# Altium PCB CH32V4x7VET-R0-1v1.PcbDoc (part 3 of 3)
Units mil, origin at the board's own origin, x right, y up, seen from the top; angles counter-clockwise.
Board outline 4188.98 x 2720.08 mil, 2 copper layers (Top Layer, Bottom Layer); 73 components, 115 nets, 417 pads, 746 vias.
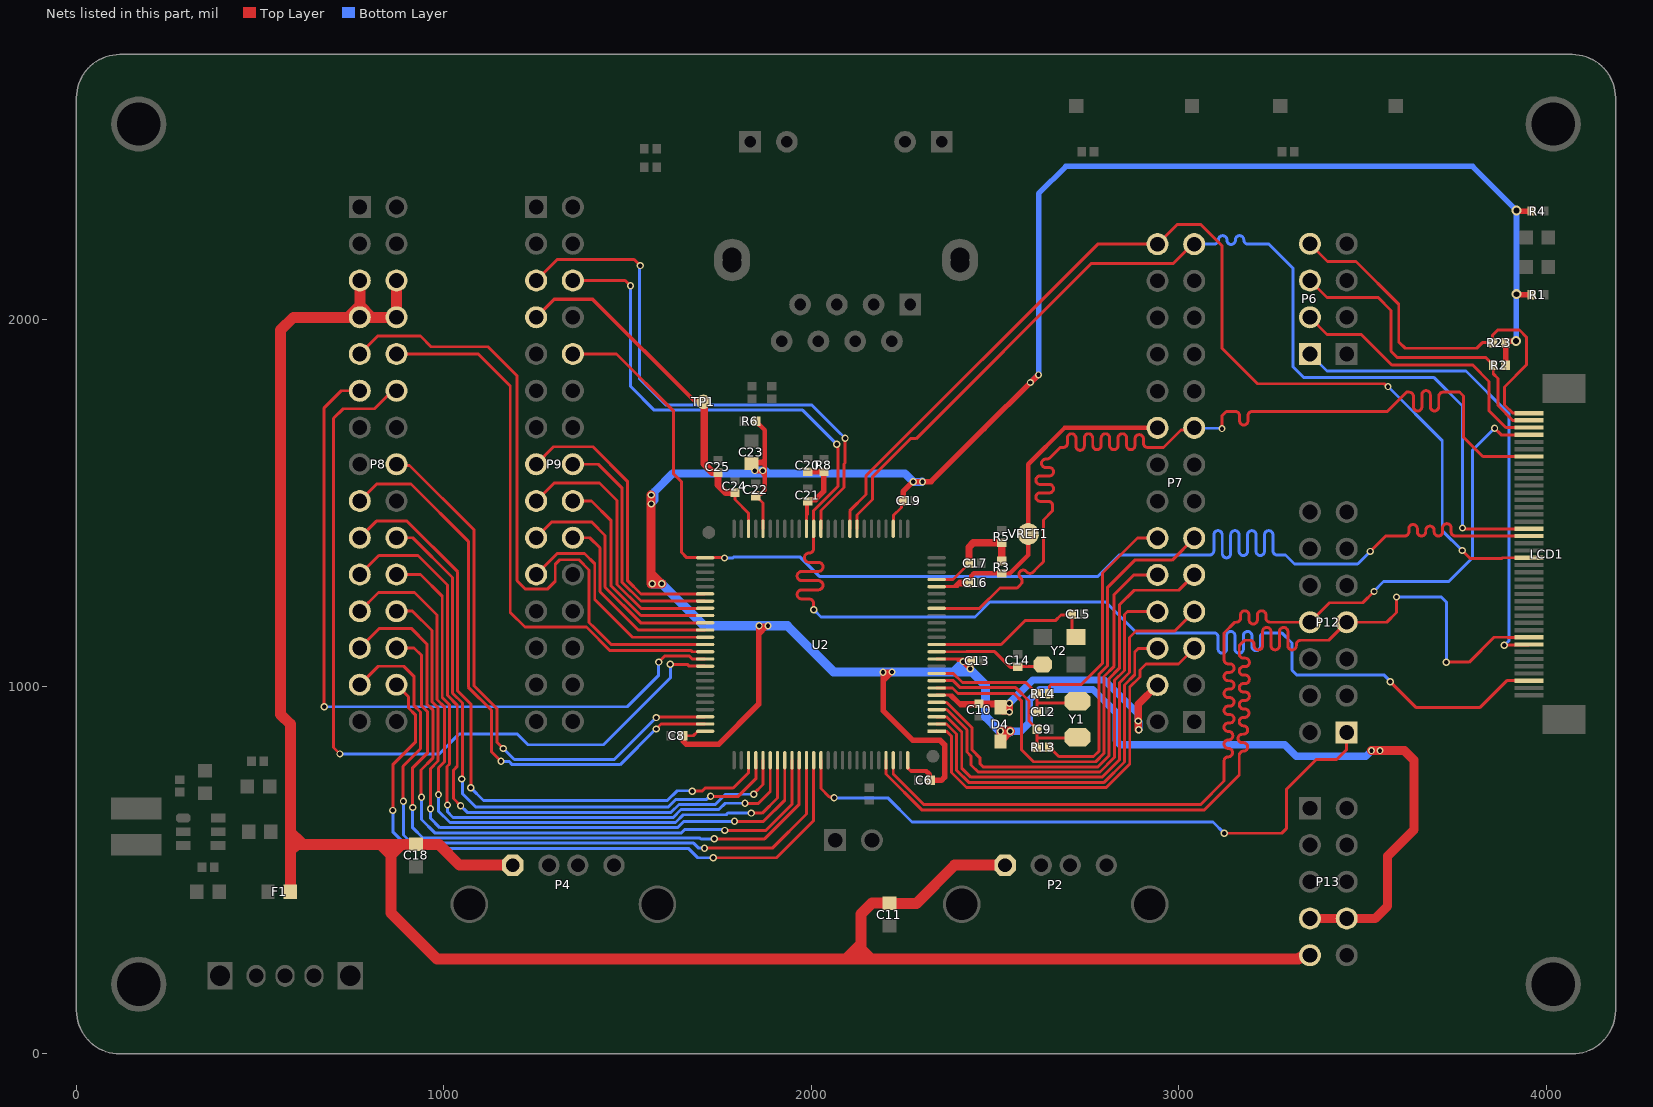
[diagram p3: the nets of this part, all layers, seen from the top]

## Via types
v1: diameter 19.68, hole 11.81, Top Layer to Bottom Layer, tented both sides, 741 vias
v2: diameter 27.56, hole 15.75, Top Layer to Bottom Layer, tented both sides, 5 vias

## Nets (pads, with @x,y where several pads share a name; then routed paths per layer and width w, separated by ;. In a path a pad name is that pad's centre, name@x,y a point inside that pad or via, vN(x,y) a via of type N, cw(c..) or ccw(c..) an arc to the next point about the centre after c; other vN are vias at no path point) (continued)
PC3: LCD1.34 P7.17 U2.18 | length 2946
  Top Layer w8: U2.18@2341.12,1212.52 2458.09,1212.52 2513.82,1268.25 2560.46,1268.25 2567.81,1275.6 2570.64,1278.43 ccw(c2562.51,1286.56) 2570.64,1294.69 2568.45,1296.88 cw(c2576.58,1305.01) 2568.45,1313.14 cw(c2576.58,1305.01) 2584.71,1313.14 2586.9,1310.95 ccw(c2595.03,1319.09) 2603.17,1310.95 2614.68,1322.47 2631.82,1339.61 2631.82,1453.12 2656.74,1478.04 2656.74,1488.3 2656.74,1492.3 ccw(c2645.24,1492.3) 2645.24,1503.8 2622.71,1503.8 cw(c2622.71,1515.3) 2622.71,1526.8 2647.98,1526.8 ccw(c2647.98,1538.3) 2647.98,1549.8 2622.71,1549.8 cw(c2622.71,1561.3) 2622.71,1572.8 2647.98,1572.8 ccw(c2647.98,1584.3) 2647.98,1595.8 2638.26,1595.8 cw(c2638.26,1607.3) 2638.26,1618.8 2641.21,1618.8 ccw(c2641.21,1630.3) 2649.34,1622.17 2675.1,1647.93 2677.55,1650.38 2681.55,1650.38 2685.55,1650.38 ccw(c2685.55,1661.88) 2697.05,1661.88 2697.05,1676.32 cw(c2708.55,1676.32) 2720.05,1676.32 2720.05,1654.08 ccw(c2731.55,1654.08) 2743.05,1654.08 2743.05,1676.32 cw(c2754.55,1676.32) 2766.05,1676.32 2766.05,1655.93 ccw(c2777.55,1655.93) 2789.05,1655.93 2789.05,1676.32 cw(c2800.55,1676.32) 2812.05,1676.32 2812.05,1655.93 ccw(c2823.55,1655.93) 2835.05,1655.93 2835.05,1676.32 cw(c2846.55,1676.32) 2858.05,1676.32 2858.05,1655.93 ccw(c2869.55,1655.93) 2881.05,1655.93 2881.05,1673.81 cw(c2892.55,1673.81) 2904.05,1673.81 2904.05,1661.88 ccw(c2915.55,1661.88) 2915.55,1650.38 2953.5,1650.38 2958.73,1650.38 3006.6,1698.25 3036.73,1698.25 P7.17@3042.2,1703.72 ; v1(3118.01,1701.74) 3118.01,1736.86 3127.11,1745.95 3129.59,1748.43 3154.11,1748.43 cw(c3154.11,1736.93) 3165.61,1736.93 3165.61,1723.07 ccw(c3177.11,1723.07) 3188.61,1723.07 3188.61,1736.93 cw(c3200.11,1736.93) 3200.11,1748.43 3229.11,1748.43 3567.5,1748.43 3606.02,1786.94 3619.94,1800.87 3627.27,1800.87 cw(c3627.27,1789.37) 3638.77,1789.37 3638.77,1761.08 ccw(c3650.27,1761.08) 3661.77,1761.08 3661.77,1793.61 cw(c3673.27,1793.61) 3684.77,1793.61 3684.77,1761.36 ccw(c3696.27,1761.36) 3707.77,1761.36 3707.77,1789.37 cw(c3719.27,1789.37) 3719.27,1800.87 3764.65,1800.87 3767.16,1798.36 3775.33,1790.19 3775.33,1678.11 3827.64,1625.8 LCD1.34@3953.86,1625.8
  Bottom Layer w8: P7.17@3042.2,1703.72 3043.19,1702.73 3117.02,1702.73 v1(3118.01,1701.74)
PC4: LCD1.24 P7.27 U2.33 | length 2939.8
  Top Layer w8: U2.33@2124.59,1429.05 2124.59,1466.47 2166.7,1508.58 2166.7,1570.91 2270.17,1674.39 2285.53,1674.39 2762.73,2151.58 2985.53,2151.58 P7.27@3044.06,2210.1 ; v1(3772.43,1431.3) 3774.67,1429.07 3782.76,1429.07 3782.96,1428.87 3953.77,1428.87 LCD1.24@3953.86,1428.95
  Bottom Layer w8: P7.27@3042.2,2203.72 3092.65,2203.72 3096.65,2203.72 ccw(c3096.65,2215.22) 3108.15,2215.22 ; 3108.15,2215.26 cw(c3119.65,2215.26) 3131.15,2215.26 3131.15,2214.48 ccw(c3142.65,2214.48) 3154.15,2214.48 3154.15,2215.26 cw(c3165.65,2215.26) 3177.15,2215.26 ; 3177.15,2215.22 ccw(c3188.65,2215.22) 3188.65,2203.72 3222.69,2203.72 3245.69,2203.72 3311.06,2138.36 3311.06,1870.13 3340.92,1840.26 3695.41,1840.26 3772.43,1763.24 v1(3772.43,1431.3)
PC5: LCD1.20 P7.28 U2.34 | length 2934.7
  Top Layer w8: U2.34@2104.9,1429.05 2104.9,1478.06 2149.26,1522.42 2149.26,1573.28 2779.71,2203.72 P7.28@2942.2,2203.72 2942.65,2203.72 2996.09,2257.16 3059.98,2257.16 3117.82,2199.32 3117.82,1920.16 3214.17,1823.81 3559.31,1823.81 3567.04,1816.08 v1(3569.84,1816.08) ; v1(3771.49,1369.77) 3793.18,1348.09 3880.1,1348.09 3882.22,1350.21 LCD1.20@3953.86,1350.21
  Bottom Layer w8: v1(3569.84,1816.08) 3717.35,1668.57 3717.35,1423.92 v1(3771.49,1369.77)
PC6: P8.9 U2.63 | length 1811.8
  Top Layer w8: P8.9@771.2,1904.72 820.01,1953.54 936.06,1953.54 965.16,1924.44 1120.04,1924.44 1198.89,1845.6 1198.89,1287.93 1222.09,1264.72 1281.67,1264.72 1303.24,1286.29 1303.24,1332.58 1315.39,1344.72 1367.77,1344.72 1395.27,1317.23 1395.27,1174.23 1410.78,1158.72 1455.41,1114.09 U2.63@1711.2,1114.09
PC7: P8.10 U2.64 | length 1536.7
  Top Layer w8: P8.10@871.2,1904.72 1093.66,1904.72 1180.72,1817.66 1180.72,1201.35 1220.47,1161.6 1388.11,1161.6 1452.33,1097.38 1673.01,1097.38 1675.98,1094.41 U2.64@1711.2,1094.41
PC8: P8.11 U2.65 | length 2049.2
  Top Layer w8: v1(674.25,944.45) 674.25,1758.26 720.72,1804.72 P8.11@771.2,1804.72 ; v1(1584.68,1066.14) 1601.92,1083.38 1667.22,1083.38 1675.87,1074.72 U2.65@1711.2,1074.72
  Bottom Layer w8: v1(674.25,944.45) 674.52,944.72 1499.24,944.72 1584.68,1030.17 v1(1584.68,1066.14)
PC9: P8.12 U2.66 | length 2266.2
  Top Layer w8: v1(717.09,816.42) 699.95,833.55 699.95,1729.65 725.99,1755.69 811.48,1755.69 860.51,1804.72 P8.12@871.2,1804.72 ; v1(1616.46,1060.22) 1662.64,1060.22 1667.82,1055.04 U2.66@1711.2,1055.04
  Bottom Layer w8: v1(717.09,816.42) 987.41,816.42 1042.04,871.05 1199.37,871.05 1229.09,841.34 1434.55,841.34 1616.46,1023.25 v1(1616.46,1060.22)
PC10: P8.19 U2.78 | length 1782.6
  Top Layer w8: P8.19@771.2,1404.72 816.18,1449.7 899.76,1449.7 1037.6,1311.86 1037.6,987.34 1074.44,950.51 1074.44,725.15 v1(1073.26,723.97) ; v1(1676.3,714.82) 1702.21,714.82 1707.05,719.66 1707.26,719.66 1710.96,723.35 1787.54,723.35 1829.31,765.13 U2.78@1829.31,799.13
  Bottom Layer w8: v1(1073.26,723.97) 1108,689.24 1608.23,689.24 1635.03,716.03 1675.09,716.03 v1(1676.3,714.82)
PC11: P8.20 U2.79 | length 1694.1
  Top Layer w8: P8.20@871.2,1404.72 915.4,1404.72 1023.6,1296.52 1023.6,981.54 1050.38,954.77 1050.38,749.41 v1(1048.89,747.91) ; v1(1725.94,701.4) 1726.39,700.96 1801.44,700.96 1849,748.51 U2.79@1849,799.13
  Bottom Layer w8: v1(1048.89,747.91) 1050.38,746.42 1050.38,707.96 1086.05,672.29 1611.09,672.29 1631.61,692.81 1715.42,692.81 1724,701.4 v1(1725.94,701.4)
PC12: P8.21 U2.80 | length 1846
  Top Layer w8: P8.21@771.2,1304.72 822.96,1356.48 929.4,1356.48 1009.6,1276.28 1009.6,975.74 1036.38,948.97 1036.38,782.48 1026,772.1 1026,695.11 v1(1045.55,675.56) ; v1(1843.54,706.59) 1843.54,707.69 1868.68,732.82 U2.80@1868.68,799.13
  Bottom Layer w8: v1(1045.55,675.56) 1063.62,657.49 1618.56,657.49 1639.89,678.81 1738.68,678.81 1766.46,706.59 v1(1843.54,706.59)
PC13: P7.10 U2.7 | length 1210
  Top Layer w8: U2.7@2341.12,995.98 2384.33,995.98 2399.4,980.92 2551.53,980.92 2572.66,959.79 2572.66,826.78 2604.46,794.98 2773.92,794.98 2796.79,817.85 2796.79,1027.39 2824.42,1055.01 2824.42,1250.02 2878.12,1303.72 P7.10@2942.2,1303.72
PC14: P7.11 R13.1 | length 899.6
  Top Layer w8: R13.1@2647.79,834.91 2647.79,833.93 2655.6,826.12 2656.58,826.12 2673.72,808.98 2768.12,808.98 2782.79,823.65 2782.79,1033.18 2806.74,1057.13 2806.74,1270.09 2880.37,1343.72 2982.2,1343.72 P7.11@3042.2,1403.72
PC15: P7.12 R14.1 | length 625.8
  Top Layer w8: R14.1@2647.79,979.91 2647.79,1000.06 2652.67,1004.94 2734.75,1004.94 2792.74,1062.93 2792.74,1308.83 2887.63,1403.72 P7.12@2942.2,1403.72
PD0: P8.22 U2.81 | length 1746.7
  Top Layer w8: P8.22@871.2,1304.72 936.25,1304.72 995.6,1245.37 995.6,969.94 1015.19,950.36 1015.19,788.43 1008.83,782.07 1008.83,678.29 v1(1009.95,677.17) ; v1(1819.43,682.13) 1820.23,681.33 1855.93,681.33 1888.37,713.77 U2.81@1888.37,799.13
  Bottom Layer w8: v1(1009.95,677.17) 1009.95,658.72 1025.18,643.49 1624.36,643.49 1645.68,664.81 1748.39,664.81 1765.7,682.13 v1(1819.43,682.13)
PD1: P8.23 U2.82 | length 1871.2
  Top Layer w8: P8.23@771.2,1204.72 822.05,1255.58 920.39,1255.58 981.6,1194.36 981.6,964.15 1001.19,944.56 1001.19,794.23 985.35,778.38 v1(985.35,705.66) ; v1(1836.65,655.21) 1836.84,655.02 1866.4,655.02 1908.05,696.67 U2.82@1908.05,799.13
  Bottom Layer w8: v1(985.35,705.66) 985.78,705.22 985.78,660.3 1016.6,629.49 1630.15,629.49 1651.48,650.81 1768.5,650.81 1772.89,655.21 v1(1836.65,655.21)
PD2: P8.24 U2.83 | length 1759.2
  Top Layer w8: P8.24@871.2,1204.72 914.78,1204.72 967.6,1151.9 967.6,958.35 983.87,942.08 983.87,796.71 963.27,776.1 963.27,681.91 963.44,681.74 v1(963.44,666.88) ; v1(1791.12,632.85) 1870.3,632.85 1927.74,690.29 U2.83@1927.74,799.13
  Bottom Layer w8: v1(963.44,666.88) 963.44,641.05 989,615.49 1635.95,615.49 1653.32,632.85 v1(1791.12,632.85)
PD3: P8.25 U2.84 | length 1898.1
  Top Layer w8: P8.25@771.2,1104.72 824.58,1158.1 911.29,1158.1 953.6,1115.78 953.6,952.55 969.87,936.28 969.87,804.71 937.61,772.45 937.61,699.67 v1(939.06,698.21) ; v1(1764.35,608.18) 1876.31,608.18 1947.42,679.29 U2.84@1947.42,799.13
  Bottom Layer w8: v1(939.06,698.21) 939.06,637.69 975.26,601.49 1646.6,601.49 1655.5,610.39 1762.14,610.39 v1(1764.35,608.18)
PD4: P8.26 U2.85 | length 1792.4
  Top Layer w8: P8.26@871.2,1104.72 918.71,1104.72 939.6,1083.83 939.6,946.75 955.87,930.48 955.87,819.58 915.1,778.81 v1(915.1,670.7) ; v1(1735.81,585.31) 1873.24,585.31 1967.11,679.18 U2.85@1967.11,799.13
  Bottom Layer w8: v1(915.1,670.7) 915.1,615.39 943.01,587.49 1697.08,587.49 1699.25,585.31 v1(1735.81,585.31)
PD5: P8.27 U2.86 | length 1935.6
  Top Layer w8: P8.27@771.2,1004.72 821.47,1055 890.78,1055 919.15,1026.63 919.15,947.4 936.35,930.2 936.35,830.53 888.49,782.67 888.49,688.57 v1(889.85,687.21) ; v1(1709.21,559.85) 1893.87,559.85 1986.79,652.77 U2.86@1986.79,799.13
  Bottom Layer w8: v1(889.85,687.21) 889.85,595.64 912.01,573.49 1679.99,573.49 1693.63,559.85 v1(1709.21,559.85)
PD6: P8.28 U2.87 | length 1827.8
  Top Layer w8: v1(861.05,662.61) 861.05,786.8 922.35,848.11 922.35,923.1 904.12,941.32 904.12,971.8 P8.28@871.2,1004.72 ; v1(1733.04,533.68) 1905.41,533.68 2006.48,634.75 U2.87@2006.48,799.13
  Bottom Layer w8: v1(861.05,662.61) 861.05,604.56 906.11,559.49 1665.18,559.49 1690.98,533.68 v1(1733.04,533.68)
PD7: P12.1 U2.88 | length 1762.1
  Top Layer w8: U2.88@2026.16,799.13 2026.16,721.88 2049.14,698.91 2059.99,698.91 v1(2062.16,696.74) ; v1(3123.93,600.45) 3280.5,600.45 3292.87,612.81 3292.87,719.57 3374.1,800.81 3430.02,800.81 3457.2,827.99 P12.1@3457.2,874.72
  Bottom Layer w8: v1(2062.16,696.74) 2208.38,696.74 2273.81,631.3 3093.07,631.3 v1(3123.93,600.45)
PD8: LCD1.23 P9.10 U2.51 | length 3731.1
  Top Layer w8: P9.10@1351.2,1904.72 1470.02,1904.72 1625.6,1749.15 1625.6,1577.96 1647.22,1556.34 1647.22,1364.16 1660.87,1350.51 1711.01,1350.51 U2.51@1711.2,1350.31 1763.1,1350.31 v1(1763.97,1349.44) ; v1(3521.42,1367.47) 3563.41,1409.46 3610.83,1409.46 3614.83,1409.46 ccw(c3614.83,1420.96) 3626.33,1420.96 3626.33,1429.26 cw(c3637.83,1429.26) 3649.33,1429.26 3649.33,1420.96 ccw(c3660.83,1420.96) 3672.33,1420.96 3672.33,1424.82 cw(c3683.83,1424.82) 3695.33,1424.82 3695.33,1420.96 ccw(c3706.83,1420.96) 3718.33,1420.96 3718.33,1431.47 cw(c3729.83,1431.47) 3741.33,1431.47 3741.33,1420.96 ccw(c3752.83,1420.96) 3752.83,1409.46 3780.55,1409.46 3953.67,1409.46 LCD1.23@3953.86,1409.27
  Bottom Layer w8: v1(1763.97,1349.44) 1786.61,1349.44 1789.81,1352.65 1968.87,1352.65 2021.77,1299.75 2780.28,1299.75 2838.25,1357.72 3080,1357.72 3084.01,1357.72 ccw(c3084.01,1369.22) 3095.51,1369.22 3095.51,1412.52 cw(c3107.01,1412.52) 3118.51,1412.52 3118.51,1361.55 ccw(c3130.01,1361.55) 3141.51,1361.55 3141.51,1412.52 cw(c3153.01,1412.52) 3164.51,1412.52 3164.51,1367.82 ccw(c3176.01,1367.82) 3187.51,1367.82 3187.51,1412.52 cw(c3199.01,1412.52) 3210.51,1412.52 3210.51,1367.82 ccw(c3222.01,1367.82) 3233.51,1367.82 3233.51,1412.52 cw(c3245.01,1412.52) 3256.51,1412.52 3256.51,1369.22 ccw(c3268.01,1369.22) 3268.01,1357.72 3290.78,1357.72 3315.34,1333.16 3321.91,1333.16 3487.11,1333.16 v1(3521.42,1367.47)
PD9: P9.15 U2.56 | length 803.5
  Top Layer w8: P9.15@1251.2,1604.72 1298.76,1652.29 1405.64,1652.29 1499.36,1558.57 1499.36,1288.94 1536.4,1251.89 U2.56@1711.2,1251.89
PD10: P9.16 U2.57 | length 664.4
  Top Layer w8: P9.16@1351.2,1604.72 1420.06,1604.72 1485.36,1539.43 1485.36,1283.14 1536.29,1232.2 U2.57@1711.2,1232.2
PD11: P9.17 U2.58 | length 755.6
  Top Layer w8: P9.17@1251.2,1504.72 1300.34,1553.86 1423.3,1553.86 1471.36,1505.81 1471.36,1277.34 1536.18,1212.52 U2.58@1711.2,1212.52
PD12: P9.18 U2.59 | length 593.4
  Top Layer w8: P9.18@1351.2,1504.72 1402.13,1504.72 1454.41,1452.45 1454.41,1274.49 1536.06,1192.83 U2.59@1711.2,1192.83
PD13: P9.19 U2.60 | length 673.4
  Top Layer w8: P9.19@1251.2,1404.72 1293.65,1447.17 1402.43,1447.17 1438.92,1410.69 1438.92,1270.18 1535.95,1173.15 U2.60@1711.2,1173.15
PD14: P9.20 U2.61 | length 533.9
  Top Layer w8: P9.20@1351.2,1404.72 1397.03,1404.72 1424.61,1377.14 1424.61,1257.88 1529.02,1153.46 U2.61@1711.2,1153.46
PD15: P9.21 U2.62 | length 635.2
  Top Layer w8: P9.21@1251.2,1304.72 1308.46,1361.98 1382.82,1361.98 1410.61,1334.19 1410.61,1236.92 1513.74,1133.78 U2.62@1711.2,1133.78
PE0: LCD1.9 P12.7 U2.97 | length 2933.3
  Top Layer w8: U2.97@2203.33,799.13 2203.33,761.65 2300.7,664.28 3070.04,664.28 3164.77,759.01 3164.77,761.35 3164.77,812.35 cw(c3176.27,812.35) 3176.27,823.85 ccw(c3176.27,835.35) 3176.27,846.85 3172.99,846.85 cw(c3172.99,858.35) 3172.99,869.85 3176.27,869.85 ccw(c3176.27,881.35) 3176.27,892.85 cw(c3176.27,904.35) 3176.27,915.85 3179.75,915.85 ccw(c3179.75,927.35) 3179.75,938.85 3176.27,938.85 cw(c3176.27,950.35) 3176.27,961.85 3180.81,961.85 ccw(c3180.81,973.35) 3180.81,984.85 3176.27,984.85 cw(c3176.27,996.35) 3176.27,1007.85 3180.81,1007.85 ccw(c3180.81,1019.35) 3180.81,1030.85 3176.27,1030.85 cw(c3176.27,1042.35) 3176.27,1053.85 3180.81,1053.85 ccw(c3180.81,1065.35) 3180.81,1076.85 3176.27,1076.85 cw(c3176.27,1088.35) 3164.77,1088.35 3164.77,1092.35 3164.77,1110.93 3169.79,1115.95 3179.48,1125.65 3193.62,1125.65 cw(c3193.62,1114.15) 3205.12,1114.15 3205.12,1111.03 ccw(c3216.62,1111.03) 3228.12,1111.03 3228.12,1149.22 cw(c3239.62,1149.22) 3251.12,1149.22 3251.12,1111.03 ccw(c3262.62,1111.03) 3274.12,1111.03 3274.12,1149.22 cw(c3285.62,1149.22) 3297.12,1149.22 3297.12,1111.03 ccw(c3308.62,1111.03) 3320.12,1111.03 3320.12,1114.15 cw(c3331.62,1114.15) 3331.62,1125.65 3335.62,1125.65 3408.12,1125.65 P12.7@3457.2,1174.72 3566.03,1174.72 3592.72,1201.42 v1(3592.72,1243.29) ; v1(3728.07,1066.04) 3790.52,1066.04 3858.34,1133.86 3895.29,1133.86 3895.47,1133.68 LCD1.9@3953.86,1133.68
  Bottom Layer w8: v1(3592.72,1243.29) 3714.85,1243.29 3728.81,1229.34 3728.81,1066.78 v1(3728.07,1066.04)
PE1: LCD1.37 P12.8 U2.98 | length 2933.3
  Top Layer w8: U2.98@2223.01,799.13 2223.01,761.77 2306.5,678.28 3059.33,678.28 3123.36,742.32 3123.36,771.22 3123.36,796.98 cw(c3134.86,796.98) 3134.86,808.48 ccw(c3134.86,819.98) 3134.86,831.48 cw(c3134.86,842.98) 3134.86,854.48 3135.99,854.48 ccw(c3135.99,865.98) 3135.99,877.48 3134.86,877.48 cw(c3134.86,888.98) 3134.86,900.48 3139.27,900.48 ccw(c3139.27,911.98) 3139.27,923.48 3134.86,923.48 cw(c3134.86,934.98) 3134.86,946.48 3139.27,946.48 ccw(c3139.27,957.98) 3139.27,969.48 3134.86,969.48 cw(c3134.86,980.98) 3134.86,992.48 3139.27,992.48 ccw(c3139.27,1003.98) 3139.27,1015.48 3134.86,1015.48 cw(c3134.86,1026.98) 3134.86,1038.48 3139.27,1038.48 ccw(c3139.27,1049.98) 3139.27,1061.48 3134.86,1061.48 cw(c3134.86,1072.98) 3123.36,1072.98 3123.36,1076.98 3123.36,1145.29 3152.8,1174.72 3156.8,1174.72 ccw(c3156.8,1186.22) 3168.3,1186.22 3168.3,1194.56 cw(c3179.8,1194.56) 3191.3,1194.56 3191.3,1181.39 ccw(c3202.8,1181.39) 3214.3,1181.39 3214.3,1194.56 cw(c3225.8,1194.56) 3237.3,1194.56 3237.3,1186.22 ccw(c3248.8,1186.22) 3248.8,1174.72 3299.28,1174.72 P12.8@3357.2,1174.72 3410.23,1227.75 3501.05,1227.75 v1(3531.85,1258.56) ; v1(3859.71,1702.95) 3877.81,1684.86 LCD1.37@3953.86,1684.86
  Bottom Layer w8: v1@3531.33,1259.08 3557.57,1285.32 3735.01,1285.32 3799.72,1350.03 3799.72,1642.95 v1(3859.71,1702.95)
PE2: P7.5 U2.1 | length 1113.9
  Top Layer w8: U2.1@2341.12,878.37 2340.62,878.37 U2.1@2341.12,877.87 2368.1,877.87 2381.48,864.49 2381.48,766.03 2422.53,724.98 2802.92,724.98 2866.79,788.85 2866.79,998.39 2894.42,1026.02 2894.42,1044.69 2910.65,1060.92 2999.4,1060.92 P7.5@3042.2,1103.72
PE3: P7.6 U2.2 | length 1034.5
  Top Layer w8: U2.2@2341.12,897.56 2368.21,897.56 2395.48,870.29 2395.48,771.83 2428.33,738.98 2797.12,738.98 2852.79,794.65 2852.79,1004.19 2880.42,1031.82 2880.42,1093.68 2890.47,1103.72 P7.6@2942.2,1103.72
PE4: P7.7 U2.3 | length 1192.3
  Top Layer w8: U2.3@2341.12,917.24 2368.33,917.24 2409.48,876.09 2409.48,777.63 2434.13,752.98 2791.32,752.98 2838.79,800.45 2838.79,1009.99 2866.42,1037.62 2866.42,1133.24 2883.98,1150.8 2989.28,1150.8 P7.7@3042.2,1203.72
PE5: P7.8 U2.4 | length 1113.6
  Top Layer w8: U2.4@2341.12,936.93 2368.44,936.93 2423.48,881.89 2423.48,821.58 2435.01,810.05 2435.01,786.33 2454.36,766.98 2785.52,766.98 2824.79,806.25 2824.79,1015.79 2852.42,1043.42 2852.42,1195.72 2860.42,1203.72 P7.8@2942.2,1203.72
PE6: P7.9 U2.5 | length 1258.6
  Top Layer w8: U2.5@2341.12,956.61 2368.55,956.61 2437.48,887.68 2437.48,827.38 2458.77,806.09 2458.77,790.23 2468.02,780.98 2779.72,780.98 2810.79,812.05 2810.79,1021.59 2838.42,1049.22 2838.42,1221.46 2878.74,1261.79 3000.27,1261.79 P7.9@3042.2,1303.72
PE7: C24.2 C25.2 P9.7 TP1.1 U2.48 | length 1015.9
  Top Layer w8: C24.2@1792.32,1527.98 1792.32,1508.49 1829.31,1471.49 U2.48@1829.31,1429.05
  Top Layer w10: P9.7@1247.16,2002.41 1248.89,2002.41 P9.7@1251.2,2004.72 1300.29,2053.81 1404.82,2053.81 1680.69,1777.94 1703.32,1777.94 TP1.1@1706.53,1774.72
  Top Layer w20: TP1.1@1706.53,1774.72 1708.23,1773.02 1708.23,1605.42 1730.44,1583.21 1744.21,1583.21 C25.2@1746.02,1581.4 1746.02,1548.66 1766.7,1527.98 C24.2@1792.32,1527.98
PE8: P9.5 U2.38 | length 1522.9
  Top Layer w8: P9.5@1251.2,2104.72 1308.41,2161.93 1517.93,2161.93 v1(1534.57,2145.29) ; U2.38@2026.16,1429.05 2026.16,1478.51 2089.17,1541.52 2089.17,1605.58 2091.99,1608.41 v1(2091.99,1675.63)
  Bottom Layer w8: v1(1534.57,2145.29) 1532.87,2143.59 1532.87,1836.72 1603.65,1765.94 2001.38,1765.94 2080.33,1686.99 2080.63,1686.99 v1(2091.99,1675.63)
PE9: LCD1.3 P9.6 U2.39 | length 4249
  Top Layer w8: P9.6@1351.2,2104.72 1493.38,2104.72 v1(1507.8,2090.31) ; v1(2006.48,1208.81) 2006.48,1221.39 2006.48,1225.39 ccw(c1993.98,1225.39) 1993.98,1237.89 1973.98,1237.89 cw(c1973.98,1250.39) 1973.98,1262.89 2019.35,1262.89 ccw(c2019.35,1275.39) 2019.35,1287.89 1973.98,1287.89 cw(c1973.98,1300.39) 1973.98,1312.89 2019.35,1312.89 ccw(c2019.35,1325.39) 2019.35,1337.89 1993.74,1337.89 cw(c1993.74,1350.39) 1993.74,1362.89 1993.98,1362.89 ccw(c1993.98,1375.39) 2006.48,1375.39 2006.48,1413.5 U2.39@2006.48,1429.05 2006.48,1478.63 2072.67,1544.82 2072.67,1648.4 2071.77,1649.3 2071.77,1656.69 v1(2069.53,1658.93) ; v1(3575.74,1012.69) 3645.3,943.13 3820.55,943.13 3892.98,1015.57 LCD1.3@3952.8,1015.57
  Bottom Layer w8: v1(1507.8,2090.31) 1507.8,1816.78 1572.65,1751.94 1976.52,1751.94 v1(2069.53,1658.93) ; v1(2006.48,1208.81) 2026.1,1189.18 2445.43,1189.18 2486,1229.75 2801.3,1229.75 2885.05,1146.01 3068.62,1146.01 3095.62,1146.01 cw(c3095.62,1134.51) 3107.12,1134.51 3107.12,1101.91 ccw(c3118.62,1101.91) 3130.12,1101.91 3130.12,1138.22 cw(c3141.62,1138.22) 3153.12,1138.22 3153.12,1101.91 ccw(c3164.62,1101.91) 3176.12,1101.91 3176.12,1138.22 cw(c3187.62,1138.22) 3199.12,1138.22 3199.12,1108.91 ccw(c3210.62,1108.91) 3222.12,1108.91 3222.12,1134.51 cw(c3233.62,1134.51) 3233.62,1146.01 3271.67,1146.01 3280.33,1146.01 3308.04,1118.29 3308.04,1044.31 3320.71,1031.64 3558.15,1031.64 3575.74,1014.05 v1(3575.74,1012.69)
PE10: P8.16 U2.73 | length 1522.8
  Top Layer w8: P8.16@871.2,1604.72 874.37,1601.56 906.8,1601.56 1081.46,1426.9 1081.46,1002.88 1144.14,940.2 1144.14,848.86 v1(1161.93,831.08) ; v1(1578.21,915.09) 1580.17,917.05 1711.01,917.05 U2.73@1711.2,917.24
  Bottom Layer w8: v1(1161.93,831.08) 1191.86,801.15 1464.01,801.15 1577.94,915.09 v1(1578.21,915.09)
PE11: P8.17 U2.74 | length 1619.8
  Top Layer w8: P8.17@771.2,1504.72 817.27,1550.79 910.82,1550.79 1066.62,1394.99 1066.62,997.92 1129.59,934.96 1129.59,822.21 v1(1155.57,796.23) ; v1(1577.96,884.21) 1591.31,897.56 U2.74@1711.2,897.56
  Bottom Layer w8: v1(1155.57,796.23) 1176.98,796.23 1186.06,787.15 1479.8,787.15 1576.86,884.21 v1(1577.96,884.21)
TOUCH_INT: LCD1.38 P6.2 | length 768
  Top Layer w8: P6.2@3357.2,2004.72 3403.91,1958.01 3496.76,1958.01 3580.03,1874.75 3800.33,1874.75 3844.8,1830.28 3844.8,1750.07 3890.32,1704.54 LCD1.38@3953.86,1704.54
TOUCH_RST: LCD1.8 P6.1 | length 1312.9
  Top Layer w8: v1(3886.24,1112.02) 3887.22,1113.01 3952.87,1113.01 LCD1.8@3953.86,1113.99
  Bottom Layer w8: P6.1@3357.2,1904.72 3403.59,1858.34 3782.09,1858.34 3899.45,1740.98 3899.45,1125.23 v1(3886.24,1112.02)
TOUCH_SCLK: LCD1.39 P6.3 R2.2 | length 876.9
  Top Layer w8: P6.3@3357.2,2104.72 3403.75,2058.18 3543.09,2058.18 3577.92,2023.36 3577.92,1912.37 3594.76,1895.52 3835.84,1895.52 3856,1875.36 3856,1851.01 3868.75,1838.27 3868.75,1764.25 3908.77,1724.23 LCD1.39@3953.86,1724.23
TOUCH_SDA: LCD1.40 P6.4 R23.2 | length 1093.8
  Top Layer w8: P6.4@3357.2,2204.72 3405.05,2156.87 3482.27,2156.87 3598.96,2040.18 3598.96,1937.67 3616.27,1920.36 3811.04,1920.36 3826.3,1935.61 3853.88,1935.61 3853.88,1955.76 3868.29,1970.17 3927.39,1970.17 3946.9,1950.65 3946.9,1875.36 3886.83,1815.29 3886.83,1765.97 3908.89,1743.91 LCD1.40@3953.86,1743.91
VBAT: C10.2 D4.1 P7.4 U2.6 | length 1032.6
  Top Layer w8: U2.6@2341.12,976.3 2375.06,976.3 ; C10.2@2443.83,946.19 2443.61,946.4 2404.96,946.4 2399.27,952.09 ; C10.2@2447.72,955.25 2447.03,955.94 2404.57,955.94 ; C10.2@2447.93,946.19 2447.93,950.89 C10.2@2446.73,952.09 ; C10.2@2455.53,952.09 C10.2@2446.73,952.09 ; 2375.06,976.3 2399.27,952.09 ; 2375.06,976.3 2384.21,976.3 2404.57,955.94 ; 2399.27,952.09 2408.42,952.09 ; 2404.57,955.94 2408.42,952.09 ; 2408.42,952.09 C10.2@2446.73,952.09
  Top Layer w20: C10.2@2455.53,952.09 2508.07,952.09 2514.77,945.38 D4.1@2514.77,943.04 2514.77,939.69 2521.11,933.35 2536.39,933.35 v1(2539.25,930.5) 2539.25,952.16 2521.11,952.16 2519.42,950.48 D4.1@2519.42,946.69 ; v1@2889.78,881.97 v1(2889.78,906.02) 2889.78,951.3 P7.4@2942.2,1003.72
  Bottom Layer w20: v1(2539.25,930.5) v1(2539.25,954.16) 2602.58,1017.49 2797.47,1017.49 2889.78,925.18 v1(2889.78,906.02) 2891.2,904.61 v1(2891.2,881.97)
VBUS: C11.1 C18.1 F1.1 P2.1 P4.1 P8.5 P8.6 P8.7 P8.8 P13.9 | length 6340.7
  Top Layer w30: F1.1@582,441.42 582,552.15 ; 582,604.51 611.49,575.02 ; 588.31,570.02 599.87,570.02 ; P8.5@771.2,2104.72 771.2,2036.8 ; 803.45,2004.72 803.28,2004.72 ; P8.6@871.2,2104.72 P8.8@871.2,2004.72 803.28,2004.72 ; 879.71,563.99 856.35,540.63 ; C18.1@924.27,570.22 923.29,570.22 C18.1@923.09,570.02 ; P4.1@1187.49,513.35 1043.1,513.35 986.44,570.02 C18.1@923.09,570.02 ; C11.1@2210.96,410.98 2210.19,410.2 2165.53,410.2 2135.88,380.55 2135.88,299.49 ; C11.1@2212.68,409.52 2285.84,409.52 2389.67,513.35 P2.1@2527.49,513.35 ; P13.9@3357.2,268.44 3351.46,262.7 3330.25,262.7 3325.82,258.27 2162.91,258.27 ; 582,552.15 582,897.85 555.65,924.2 555.65,1969.69 590.68,2004.72 739.12,2004.72 ; 582,552.15 599.87,570.02 ; 599.87,570.02 826.95,570.02 ; 739.12,2004.72 771.2,2036.8 ; 739.12,2004.72 P8.7@771.2,2004.72 ; P8.7@771.2,2004.72 803.28,2004.72 ; P8.7@771.2,2004.72 771.2,2036.8 ; 771.2,2036.8 803.28,2004.72 ; 826.95,570.02 856.35,570.02 ; 826.95,570.02 856.35,540.63 ; 856.35,540.63 856.35,383.51 981.58,258.27 2094.66,258.27 ; 856.35,540.63 856.35,546.66 856.35,570.02 ; 856.35,570.02 879.71,570.02 C18.1@923.09,570.02 ; 2094.66,258.27 2118.31,258.27 ; 2094.66,258.27 2135.88,299.49 ; 2118.31,258.27 2135.88,275.84 2135.88,285.3 ; 2118.31,258.27 2162.91,258.27 ; 2135.88,285.3 2135.88,299.49 ; 2135.88,285.3 2162.91,258.27
VDD: C6.2 C8.1 C13.1 C19.2 C22.2 C23.2 D4.2 P13.7 P13.8 R1.1 R2.1 R4.1 R6.2 R23.1 U2.11 U2.28 U2.46 U2.75 U2.100 | length 9508.7
  Top Layer w8: C8.1@1651.2,865.72 1678.55,865.72 1690.37,877.55 1710.87,877.55 U2.75@1711.2,877.87 ; C22.2@1850.44,1517.11 1868.68,1498.87 U2.46@1868.68,1429.05 ; U2.28@2223.01,1429.05 2223.2,1429.25 2223.2,1464.94 2245.33,1487.07 2245.33,1506.16 C19.2@2249.94,1510.77 ; 2313.11,766.46 2317.7,761.88 2317.7,751.12 C6.2@2324.27,744.55 2324.27,762.26 2318.2,768.33 ; U2.11@2341.12,1074.72 2395.37,1074.72 ; v1@2411.66,1067.85 2409.69,1069.82 2400.27,1069.82 2395.37,1074.72 ; C13.1@2435.12,1069.59 2429.98,1074.72 2395.37,1074.72 ; U2.100@2262.57,778.44 2262.57,798.94 U2.100@2262.38,799.13 2262.38,778.63 U2.100@2262.57,778.44 ; U2.100@2262.57,778.44 2262.57,777.36 2268.61,771.32 ; U2.100@2262.57,778.44 2269.7,771.32 ; 2268.61,771.32 2269.7,771.32 ; 2268.61,771.32 2271.6,768.33 2318.2,768.33 ; 2269.7,771.32 2315.21,771.32 2318.2,768.33
  Top Layer w12: C22.2@1848.44,1518.13 1854.25,1523.94 1862.37,1523.94 1873.24,1534.81 1873.24,1574.98 ; C23.2@1848.44,1607.19 1871.65,1607.19 1873.24,1605.59 ; C22.2@1850.44,1517.13 C22.2@1853.44,1514.13 ; R6.2@1850.44,1721.52 1850.44,1720.54 1873.24,1697.74 1873.24,1616.94 ; v1@1850.91,1585.03 1863.19,1585.03 1873.24,1574.98 ; 1859.44,1611.05 1867.36,1611.05 1873.24,1616.94 ; 1873.24,1574.98 1873.24,1605.59 ; 1873.24,1605.59 1873.24,1616.94
  Top Layer w15: C8.1@1651.2,865.72 1651.2,851.13 1659.9,842.43 1747.87,842.43 1857.06,951.61 1857.06,1143.36 ; v1@1857.06,1160.64 1857.06,1143.36 ; v1@1861.85,1163.44 1862.43,1164.02 1881.27,1164.02 v1(1882.17,1164.92) ; v1@1876.22,1162.53 1857.06,1143.36 ; v1(2219.51,1039.11) v1@2219.25,1038.85 ; C19.2@2249.94,1510.77 2250.07,1510.77 2250.07,1530.03 v1(2277.33,1557.28) 2326.42,1557.28 2470.59,1701.45 v1(2596.41,1827.27) 2596.53,1827.39 2597.31,1827.39 2617.78,1847.86 v1(2618.56,1847.86) ; C6.2@2324.27,744.55 2354.2,744.55 2362.98,753.34 2362.98,841.27 2351.01,853.24 2276.25,853.24 2195.24,934.26 2195.24,1014.84 ; v1@2414.4,1070.42 2414.4,1066.72 v1(2432.95,1048.17) 2433.85,1049.06 C13.1@2433.85,1068.31 ; v1@2420.51,1068.25 2433.78,1068.25 C13.1@2433.85,1068.31 ; C13.1@2435.12,1069.59 C13.1@2433.85,1068.31 ; R23.1@3889.34,1934.13 3889.47,1934 R2.1@3889.47,1874.38 ; R23.1@3889.47,1935.82 3893.64,1939.99 v2@3917.05,1939.99 ; v2(3919.11,2067.64) 3920.38,2067.64 3921.99,2066.03 R1.1@3961.14,2066.03 ; v2(3919.58,2295.41) 3920.85,2295.41 3922.49,2293.78 3956.83,2293.78 3956.93,2293.88 R4.1@3961.14,2293.88 ; 2195.24,1014.84 v1@2219.25,1038.85 ; 2195.24,1014.84 v1(2195.24,1038.58) 2195.5,1038.85 v1@2219.25,1038.85
  Top Layer w25: v1@1564.17,1279.68 1564.17,1306.7 ; v1(1564.17,1521.04) v1(1564.17,1496.86) 1564.17,1306.7 ; v1@1564.2,1279.64 v1(1567.25,1279.64) v1(1593.17,1279.64) ; v1@1589.83,1281.05 1564.17,1306.7 ; D4.2@2514.77,850.12 2516.85,850.12 D4.2@2516.85,855.55 ; D4.2@2515.68,854.78 2516.08,854.78 D4.2@2516.85,855.55 ; v1(2541.66,877.92) v1@2539.22,877.92 ; P13.7@3357.2,368.44 P13.8@3457.2,368.44 3534.5,368.44 3568.57,402.51 3568.57,538.39 3640.21,610.03 3640.21,799.57 3614.48,825.3 v1(3548.01,825.3) v1(3524.72,825.3) ; D4.2@2516.85,855.55 v1@2539.22,877.92 ; D4.2@2516.85,855.55 2516.85,877.92 v1@2539.22,877.92
  Bottom Layer w15: v1(2596.41,1827.27) 2597.18,1827.27 2617.78,1847.86 v1(2618.56,1847.86) ; v1@2618.97,1848.27 2618.97,2341.29 2692.88,2415.21 3799.79,2415.21 v2(3919.58,2295.41) 3919.35,2295.18 3919.35,2067.88 v2(3919.11,2067.64) 3918.71,2067.24 3918.71,1939.39 v2@3919.23,1938.88
  Bottom Layer w20: v1(2541.66,877.92) 2570.81,877.92 2593.59,900.7 2593.59,963.14 2621.94,991.49 2766.71,991.49 2829.58,928.62 2829.58,853.09 2841.29,841.37 3288.65,841.37 3319.8,810.22 3509.64,810.22 v1(3524.72,825.3) v1(3548.01,825.3)
  Bottom Layer w22: v1(1564.17,1496.86) v1@1564.17,1498.13 ; v1@2301.8,1557.28 2301.45,1556.93 2277.68,1556.93 v1(2277.33,1557.28) 2255.27,1579.34 1882.34,1579.34 ; v1@1564.17,1498.13 v1(1564.17,1521.04) 1573.82,1530.69 ; v1@1564.17,1498.13 1573.82,1507.78 1573.82,1530.69 ; 1573.82,1530.69 1622.47,1579.34 1822.26,1579.34 ; 1822.26,1579.34 1868.02,1579.34 1882.34,1579.34 ; 1822.26,1579.34 1830.26,1587.34 v1(1846.21,1587.34) v1(1868.02,1587.34) 1874.34,1587.34 1882.34,1579.34
  Bottom Layer w25: v1@1568.14,1278.88 1568.9,1279.64 v1(1593.17,1279.64) ; v1@1593.24,1279.71 1708.04,1164.92 v1(1858.06,1164.92) v1(1882.17,1164.92) 1934.93,1164.92 2060.73,1039.11 v1(2219.51,1039.11) 2387.46,1039.11 ; v1@2412.14,1065.17 v1@2412.14,1064.8 ; v1@2513.39,878.7 2474.39,917.7 2474.39,1002.55 2437.83,1039.11 ; v1(2515.01,877.92) 2516.72,876.22 v1@2540.29,876.22 ; 2387.46,1039.11 2398.88,1039.11 ; 2387.46,1039.11 2412.14,1063.8 v1@2412.14,1064.8 ; 2398.88,1039.11 2437.83,1039.11 ; 2398.88,1039.11 2413.4,1053.63 v1@2413.4,1063.54 ; v1@2412.14,1064.8 v1@2413.4,1063.54 ; v1@2413.4,1063.54 2437.83,1039.11
  other v1: 2413.4,1067.58 2302.86,1556.93
  other v2: 3918.31,1939.99
VDDA: C17.1 R3.1 R5.2 U2.22 | length 294.2
  Top Layer w8: U2.22@2341.12,1291.26 2385.98,1291.26 C17.1@2429.2,1334.48
  Top Layer w20: C17.1@2429.2,1334.48 C17.1@2429.2,1335.46 2429.2,1379.15 2440.92,1390.87 R5.2@2518.14,1390.87 R3.1@2518.14,1341.16
VDDK: C20.2 C21.2 R8.1 U2.40 | length 266.6
  Top Layer w8: U2.40@1986.79,1429.05 1986.79,1465.57 ; C21.2@1989.27,1499.94 1986.79,1497.46 1986.79,1465.57 ; C21.2@1990.7,1501.6 1990.25,1501.14 1990.25,1469.03 1986.79,1465.57
  Top Layer w15: C21.2@1989.27,1499.94 1989.27,1502.27 1995.57,1508.56 2011.66,1508.56 2034.49,1531.39 R8.1@2034.49,1584.62 ; C20.2@1989.27,1584.62 R8.1@2033.51,1584.62
VREF+: C16.1 P7.18 R3.2 U2.21 VREF1.1 | length 989.9
  Top Layer w8: U2.21@2341.12,1271.57 2387.41,1271.57 ; C16.1@2418.99,1276.36 2402.06,1276.36 2397.27,1271.57 2387.41,1271.57 ; C16.1@2424.39,1287.53 2424.2,1287.34 2403.18,1287.34 2398.56,1282.72 ; C16.1@2429.2,1282.72 2398.56,1282.72 ; 2387.41,1271.57 2398.56,1282.72
  Top Layer w11.81: C16.1@2429.2,1282.72 2435.11,1288.63 2435.11,1300.89 2442.03,1307.81 R3.2@2518.02,1307.81 ; R3.2@2521.46,1308.17 2540.98,1308.17 2590.38,1357.57 VREF1.1@2590.38,1414.89 2590.38,1604.92 2689.19,1703.72 P7.18@2942.2,1703.72
X32KI: C9.2 R13.2 U2.8 Y1.1 | length 519.9
  Top Layer w8: U2.8@2341.12,1015.67 2386.48,1015.67 2405.44,996.71 2556.22,996.71 2592.51,960.41 2592.51,906.04 2614.32,884.23 C9.2@2614.32,883.25 2614.32,859.08 ; R13.2@2614.32,834.91 2614.32,859.08 ; Y1.1@2724.35,861.74 2698.41,861.74 2695.75,859.08 2614.32,859.08
X32KO: C12.2 R14.2 U2.9 Y1.2 | length 461.9
  Top Layer w8: U2.9@2341.12,1035.35 2386.59,1035.35 2411.24,1010.71 2583.53,1010.71 R14.2@2614.32,979.91 2614.32,954.66 ; C12.2@2614.32,931.58 2614.32,954.66 ; C12.2@2616.42,934.24 C12.2@2621.5,939.33 ; Y1.2@2695.75,961.29 2689.12,954.66 ; Y1.2@2715.12,954.66 2689.12,954.66 ; 2614.32,954.66 2689.12,954.66
XI: C14.2 U2.12 Y2.1 | length 308.5
  Top Layer w8: U2.12@2341.12,1094.41 2421.87,1094.41 2422.03,1094.57 2499.12,1094.57 2541.74,1051.95 2560.86,1051.95 C14.2@2561.85,1050.95 ; C14.2@2561.85,1053.98 2626.15,1053.98 Y2.1@2629.89,1057.72
XO: C15.2 U2.13 Y2.3 | length 464.9
  Top Layer w8: U2.13@2341.12,1114.09 2516.84,1114.09 2581.67,1178.92 2664.17,1178.92 2679.7,1194.45 C15.2@2703.59,1194.45 ; C15.2@2709.19,1196.96 2709.19,1143.77 Y2.3@2720.44,1132.52
pads on no net: ?.0 LCD1.0 P10. P10.7 S1.0 S1.3 U1.1 U2.0

## Polygon pours and split planes (outlines as drawn)
GND on Top Layer "GND" (solid, remove dead copper, pour order 0): 0,118.11 0,2601.97 cw(c118.11,2601.97) 118.11,2720.08 4070.87,2720.08 cw(c4070.87,2601.97) 4188.98,2601.97 4188.98,118.11 cw(c4070.87,118.11) 4070.87,0 118.11,0 cw(c118.11,118.11)
GND on Bottom Layer "GND" (solid, remove dead copper, pour order 1): 0,118.11 0,2601.97 cw(c118.11,2601.97) 118.11,2720.08 4070.87,2720.08 cw(c4070.87,2601.97) 4188.98,2601.97 4188.98,118.11 cw(c4070.87,118.11) 4070.87,0 118.11,0 cw(c118.11,118.11)

## Keep-outs
Keep-Out Layer:
  the board outline again, w10

## Other copper
Top Layer:
  rectangle net VDD: 1836.22,1579.92 1873.71,1617.41
  region net +5V: 517.16,193.69 517.16,320.69 498.62,339.24 432.5,339.24 414.76,356.98 414.76,572.93 410.5,577.18 369.18,577.18 364.93,572.93 364.93,303.48 386.95,281.47 451.54,281.47 461.59,271.41 461.59,190.06 465.35,186.3 513.44,186.3
  region net NetF1_2: 506.09,461.65 540.19,461.65 543,458.84 543,398.88 594.71,347.16 594.71,186 591.19,182.48 547.73,182.48 535.39,194.81 535.39,339.86 498.98,376.28 498.98,457.94
  region net VBUS: 1207.55,485.04 1042.78,485.04 978.37,549.46 621.03,549.46 611.54,539.97 611.54,421.31 606.11,415.88 572.21,415.88 567.92,420.18 567.92,575.17 593.59,600.84 992.08,600.84 1049.56,543.36 1200.86,543.36 1216.12,528.1 1216.12,493.76
  pour cut-out: 86.17,688.06 86.17,548.95 240.6,548.95 240.6,686.92
  region net 1V2: 119.64,643.58 196.56,643.58 203.92,650.94 203.92,724.95 213.72,734.75 293.19,734.75 308.59,750.14 418.39,750.14 424.2,755.94 424.2,790.16 409.34,805.02 175.79,805.02 119.64,748.86

## Silkscreen, mask and mechanical layers (free items; w line width, h text height)
Top Overlay:
  lines w6: 1689.39,1499.59 1689.39,1471.7 1847.16,1471.7 1847.16,1488.43 ; 2490.35,664.36 2504.97,664.36 2504.97,823.08 2582.57,823.08 ; 1009.22,1044.81 1009.22,1099.32 1009.22,1157.57 1190.82,1157.57 1190.82,1044.81 1009.22,1044.81 ; 1012.62,1944.5 1012.62,1997.16 1012.62,2055.05 1190.73,2055.05 1190.73,1944.5 1012.62,1944.5 ; 1420.01,1044.81 1420.01,1157.57 1598.79,1157.57 1598.79,1044.81 1420.01,1044.81
  text "CH32V4x7V-R0-1v1" at 463.6,2588.91 h40
  text "3V3" at 604.88,2287.3 h35
  text "3V3" at 933.08,2287.3 h35
  text "ELED1" at 1042.44,2286.84 h35
  text "ELED0" at 1414.91,2286.84 h35
  text "3V3" at 604.88,2187.3 h35
  text "PB0" at 1092.41,2187.68 h35
  text "PB1" at 1422.72,2187.68 h35
  text "3V3" at 933.08,2187.09 h35
  text "PC5" at 2780.48,2186.03 h35
  text "PC4" at 3104.43,2186.03 h35
  text "GND" at 3528.24,2184.58 h35
  text "SDA" at 3197.42,2163.61 h35
  text "PE8" at 1092.41,2087.42 h35
  text "PE9" at 1422.72,2087.42 h35
  text "VBUS" at 926.08,2086.87 h35
  text "PA7" at 2780.48,2086.18 h35
  text "PA6" at 3104.43,2086.18 h35
  text "VBUS" at 568.21,2080.53 h35
  text "KEY" at 3521.24,2076.14 h35
  text "VBUS" at 935.46,2075.03 h35 r270
  text "SCLK" at 3168.21,2037.26 h35
  text "PE7/" at 1053.03,2008.34 h35
  text "PB10" at 1422.72,1987.16 h35
  text "PA5" at 2780.48,1986.33 h35
  text "PA4" at 3104.43,1986.33 h35
  text "VBUS" at 565.95,1980.33 h35
  text "LED2" at 3521.24,1975.15 h35
  text "VDD18" at 1024.75,1956.27 h35
  text "INT" at 3201.08,1952.54 h35
  text "PC6" at 604.88,1886.61 h35
  text "PC7" at 933.08,1886.44 h35
  text "PB11" at 1074.92,1886.9 h35
  text "PD8" at 1422.72,1886.9 h35
  text "PA3" at 2780.48,1886.48 h35
  text "PA2" at 3104.43,1886.48 h35
  text "LED1" at 3521.24,1874.16 h35
  text "RST" at 3204,1869.28 h35
  text "PC8" at 604.88,1786.38 h35
  text "PC9" at 933.08,1786.23 h35
  text "PB12" at 1063.25,1786.64 h35
  text "PB13" at 1422.72,1786.64 h35
  text "PA1" at 2792.14,1786.64 h35
  text "PA0" at 3104.43,1786.64 h35
  text "PB14" at 1063.25,1686.37 h35
  text "PB15" at 1422.72,1686.37 h35
  text "VREF+" at 2710.5,1686.79 h35
  text "PC3" at 3104.43,1686.79 h35
  text "PA8" at 604.88,1686.14 h35
  text "PA9" at 933.08,1686.01 h35
  text "PC2" at 2780.48,1586.94 h35
  text "PC1" at 3104.43,1586.94 h35
  text "PA10" at 575.72,1585.91 h35
  text "PE10" at 933.08,1585.8 h35
  text "PD9" at 1092.41,1586.11 h35
  text "PD10" at 1422.72,1586.11 h35
  text "PE11" at 567.82,1488.66 h35
  text "NRST" at 3104.43,1489.09 h35
  text "PC0" at 2780.48,1487.09 h35
  text "PA15" at 933.08,1485.58 h35
  text "PD11" at 1074.92,1485.85 h35
  text "PD12" at 1422.72,1485.85 h35
  text "GND" at 3205.72,1457.34 h35
  text "GND" at 3529.96,1457.34 h35
  text "PC14" at 3104.43,1389.24 h35
  text "PC15" at 2751.32,1387.24 h35
  text "PC11" at 933.08,1385.37 h35
  text "PD13" at 1066.25,1385.59 h35
  text "PD14" at 1422.72,1385.59 h35
  text "PC10" at 575.72,1385.22 h35
  text "GND" at 3529.96,1357.39 h35
  text "GND" at 3205.72,1348.54 h35
  text "PE6" at 3104.43,1289.39 h35
  text "PC13" at 2751.32,1287.39 h35
  text "PD15" at 1063.25,1285.33 h35
  text "3V3" at 1422.72,1285.33 h35
  text "PC12" at 575.72,1284.99 h35
  text "PD0" at 933.08,1285.15 h35
  text "GND" at 3529.96,1257.44 h35
  text "GND" at 3205.72,1249.23 h35
  text "PE5" at 2780.48,1187.54 h35
  text "PE4" at 3104.43,1187.54 h35
  text "PD1" at 616.54,1184.75 h35
  text "PD2" at 933.08,1184.94 h35
  text "3V3" at 1092.41,1185.07 h35
  text "3V3" at 1422.72,1185.07 h35
  text "PE0" at 3529.96,1157.49 h35
  text "PE1" at 3217.38,1154.93 h35
  text "PD4" at 938.2,1143.33 h35 r270
  text "PE12/" at 1019.61,1107.46 h35
  text "PB2/" at 1426.48,1100.46 h35
  text "PE3" at 2780.48,1087.69 h35
  text "PE2" at 3104.43,1087.69 h35
  text "PD3" at 604.88,1084.52 h35
  text "BOOT0" at 1019.61,1057.78 h35
  text "PB8" at 3529.96,1057.54 h35
  text "PB9" at 3205.72,1055.62 h35
  text "BOOT1" at 1426.48,1050.78 h35
  text "VBAT" at 2759.84,993.64 h35
  text "3V3" at 3104.43,987.84 h35
  text "PD5" at 604.88,984.29 h35
  text "PD6" at 933.08,984.51 h35
  text "GND" at 1092.41,984.55 h35
  text "GND" at 1422.72,984.55 h35
  text "PB4" at 3529.96,957.65 h35
  text "PB5" at 3205.72,957 h35
  text "PA11" at 1074.92,887.7 h35
  text "PA12" at 1430.6,887.7 h35
  text "5V" at 2815.46,887.99 h35
  text "5V" at 3104.43,887.99 h35
  text "GND" at 604.88,884.29 h35
  text "GND" at 933.08,884.29 h35
  text "PB3" at 3205.72,857.7 h35
  text "PD7" at 3529.96,857.7 h35
  text "PA14/SWCLK" at 2947.87,645.34 h35
  text "TXD" at 3533.28,645.06 h35
  text "USBHS1" at 1162.68,615.75 h80
  text "USBHS2" at 2515.43,615.18 h80
  text "PA13/SWDIO" at 2947.87,544.52 h35
  text "RXD" at 3533.28,544.52 h35
  text "PB6" at 2007,470.56 h35
  text "PB7" at 2132.32,470.56 h35
  text "GND" at 3186.52,443.98 h35
  text "GND" at 3533.28,443.98 h35
  text "VDD" at 3186.52,343.45 h35
  text "VDD" at 3533.28,343.45 h35
  text "VBUS" at 3151.53,242.91 h35
  text "5V" at 3533.28,242.91 h35
  text "ON" at 453.63,44.14 h35
  text "OFF" at 598.69,44.14 h35
Bottom Overlay:
  lines w10: 19.69,39.37 4169.29,39.37 4169.29,2680.71 19.69,2680.71 19.69,39.37
Mechanical 1:
  the board outline again, w10

## Text inside footprints (layer, text, board x,y; h text height)
D1: Top Overlay "+" at 4044.31,2152.39 h40 r270
D2: Top Overlay "+" at 4044.31,2232.93 h40 r270
D3: Top Overlay "+" at 426.9,717.05 h40 r90
P2: Top Overlay "G" at 2787.49,393.35 h40; Top Overlay "V" at 2507.49,393.35 h40; Top Overlay "D+" at 2677.49,393.35 h40; Top Overlay "D-" at 2587.49,393.35 h40
P4: Top Overlay "D-" at 1247.49,393.35 h40; Top Overlay "D+" at 1337.49,393.35 h40; Top Overlay "V" at 1167.49,393.35 h40; Top Overlay "G" at 1447.49,393.35 h40